# Altium PCB PCB1.PcbDoc
Units mm, origin at the board's own origin, x right, y up, seen from the top; angles counter-clockwise.
Board outline 66.42 x 48.26 mm, 2 copper layers (Top Layer, Bottom Layer); 20 components, 11 nets, 48 pads, 0 vias.
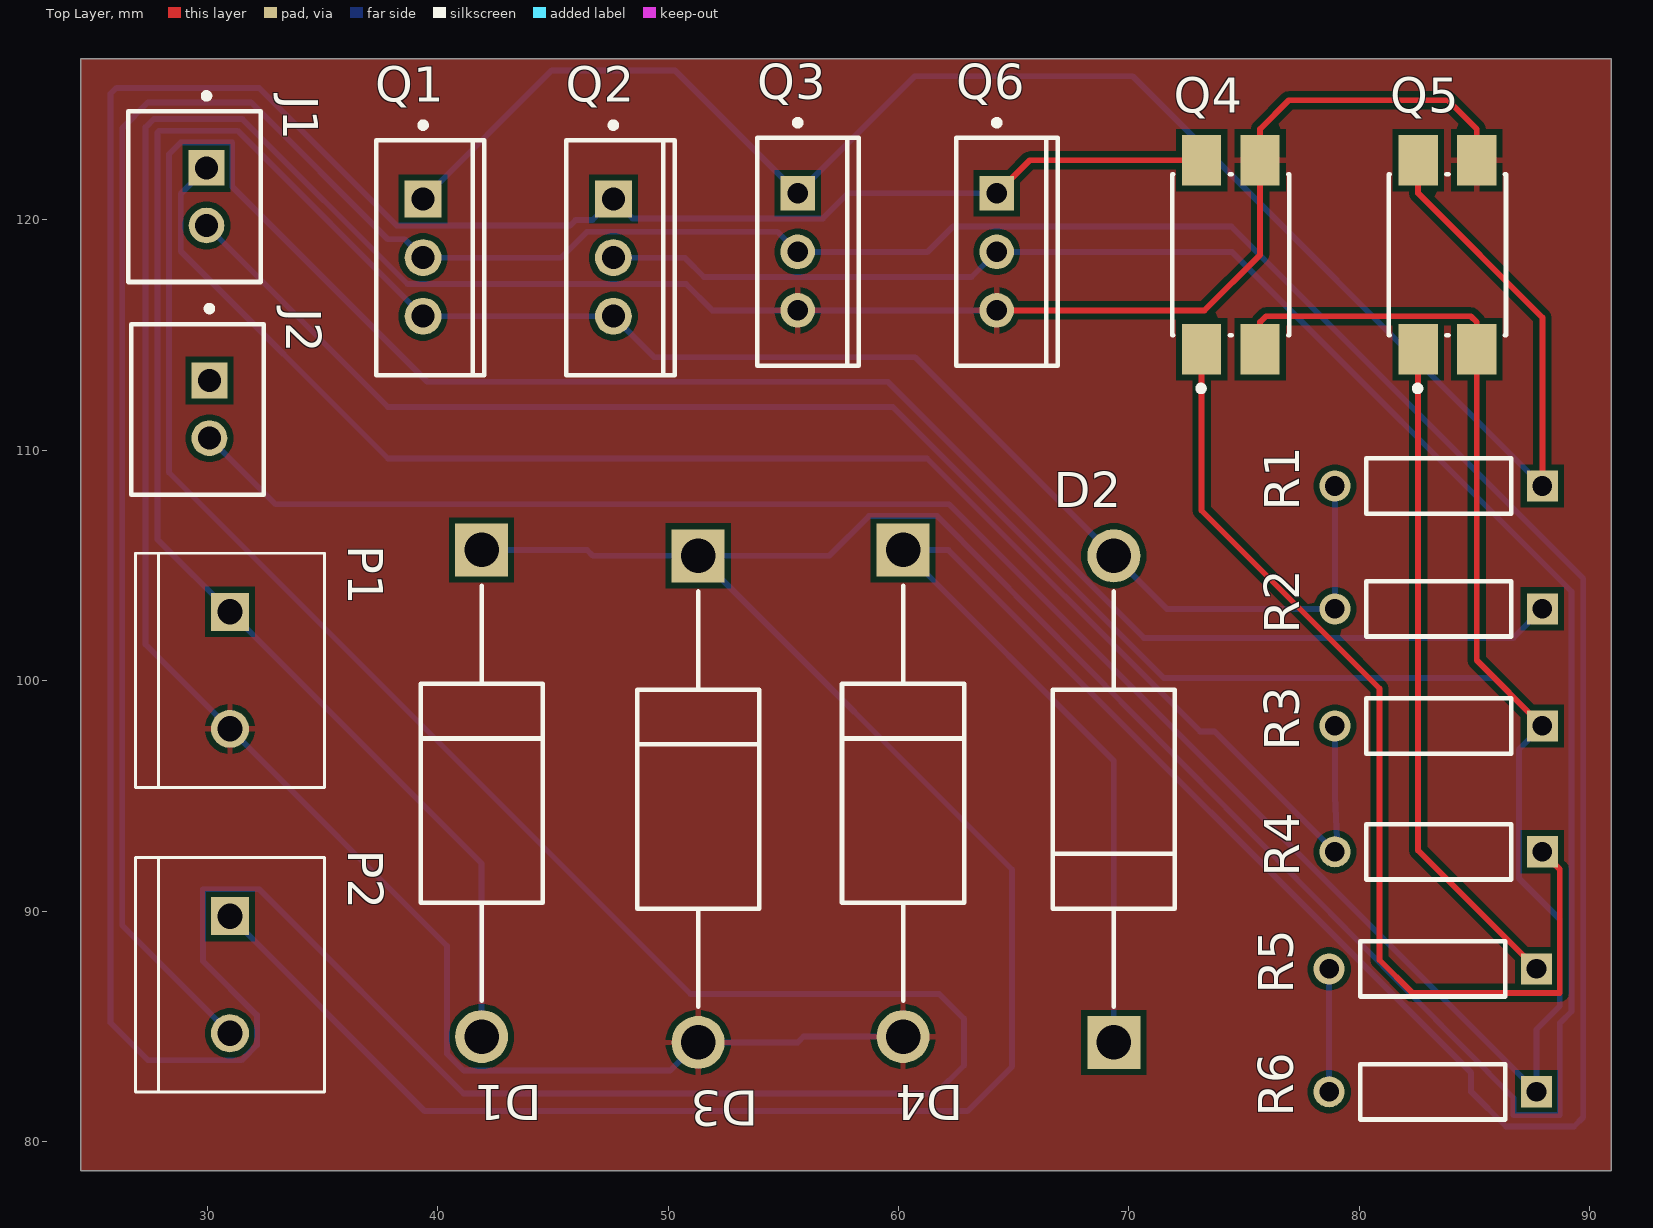
[diagram p0: Top Layer view]
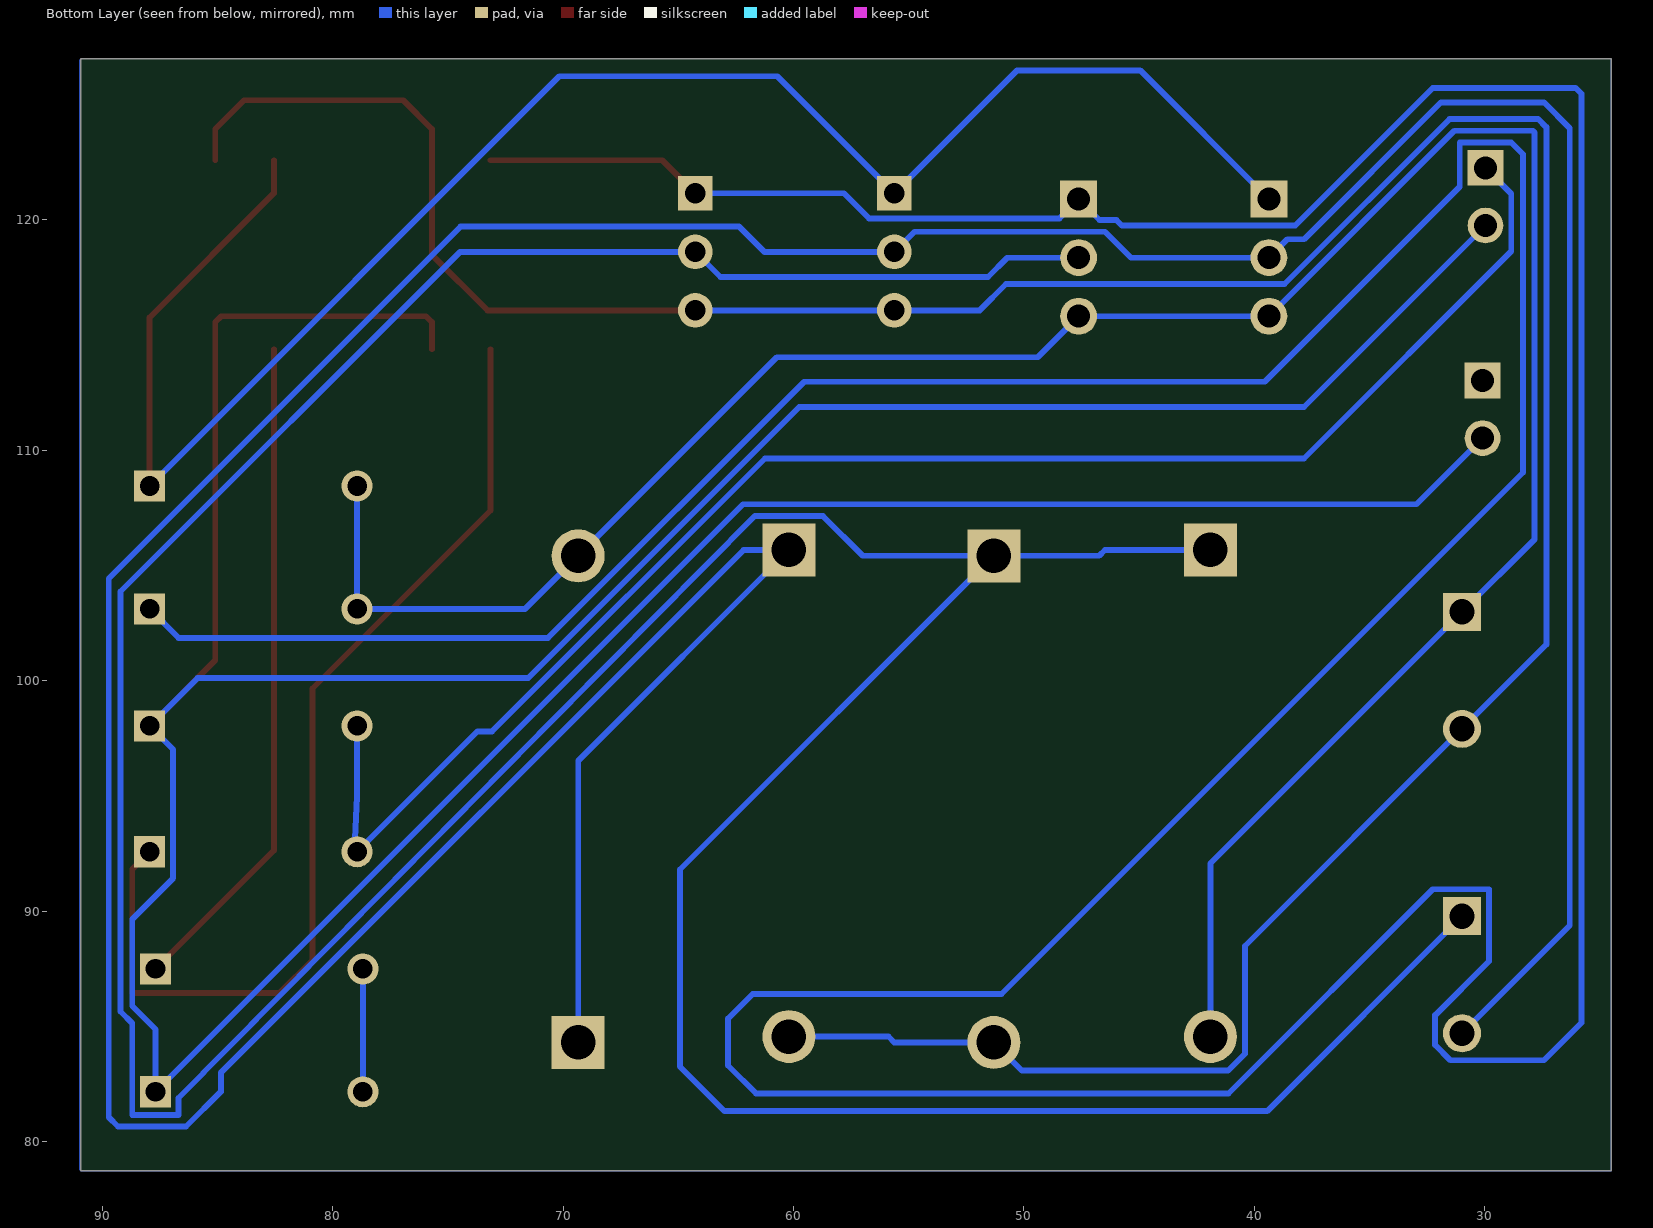
[diagram p1: Bottom Layer view, seen from below]
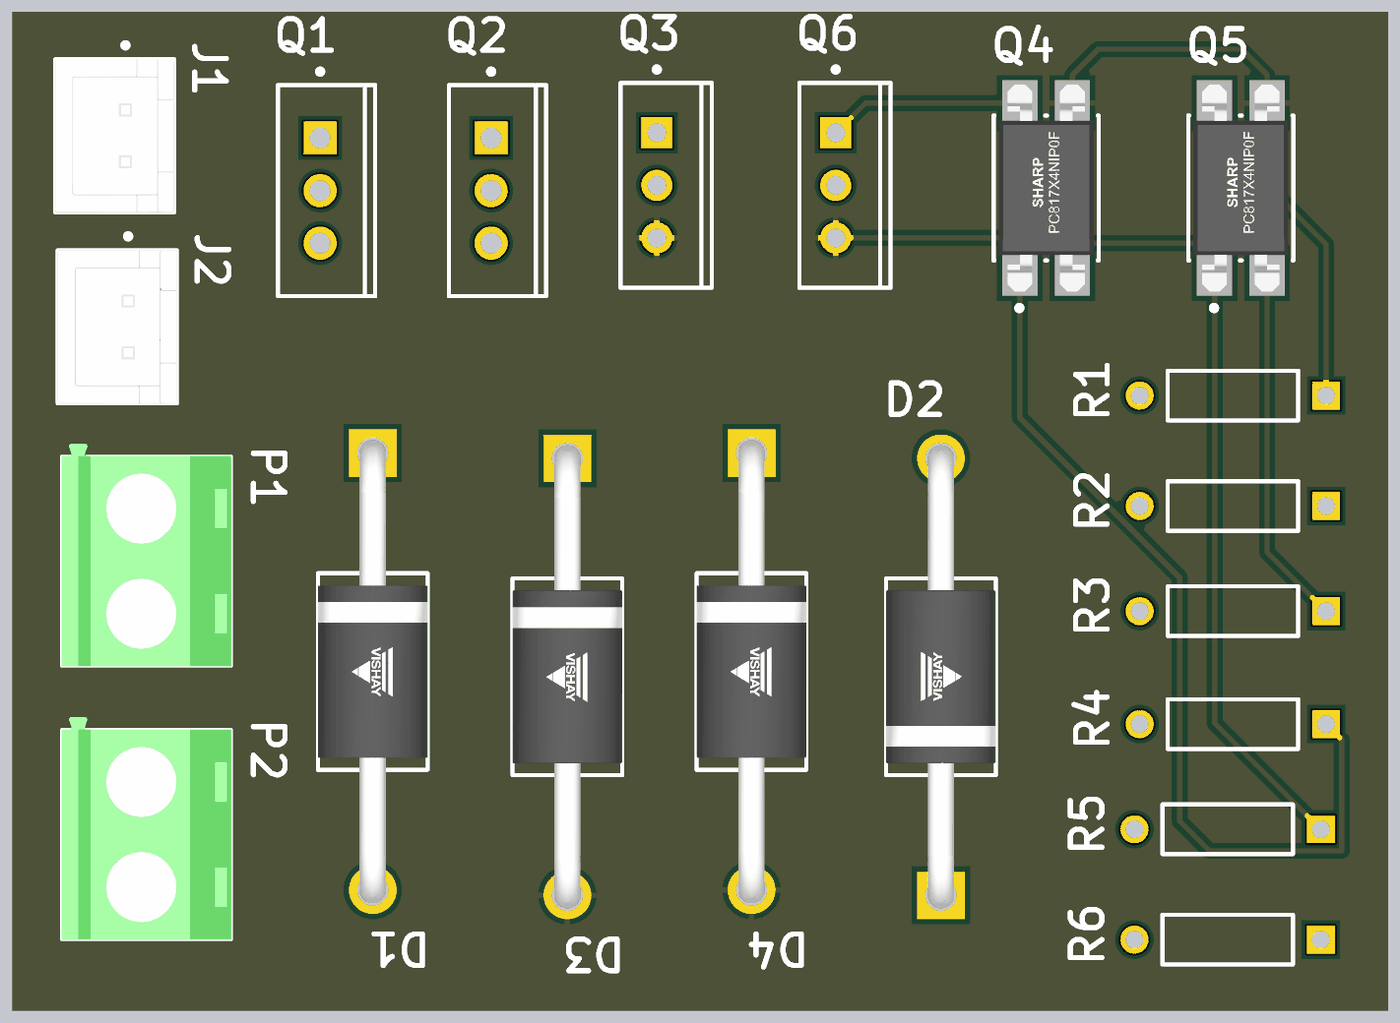
[diagram p2: 3D render of the assembled board from above, using the file's embedded part models]

## Layer stack, top to bottom
Top Solder: solder mask 0.0102, Solder Resist, Dk 3.5
Top Layer: signal copper 0.0356
Dielectric 1: dielectric 0.32, FR-4, Dk 4.8
Bottom Layer: signal copper 0.0356
Bottom Solder: solder mask 0.0102, Solder Resist, Dk 3.5

## Board outline
24.511,78.74 90.932,78.74 90.932,127 24.511,127

## Design rules (kind name [scope] priority, off if disabled: settings)
Clearance [All] p1: gap=0.254 ignorepadtopadclearanceinfootprint=FALSE except(0.127: SMDPad-SMDPad SMDPad-THPad THPad-THPad; 0.2: Arc-SMDPad Arc-THPad Track-SMDPad Track-THPad)
HoleSize [All] p1: absolutevalues=TRUE maxlimit=6.3 minlimit=0.3 maxpercent=80.000 minpercent=20.000
MinimumAnnularRing [All] p1: minimumring=0.13
PolygonConnect [All] p1: connectstyle=Relief reliefconductorwidth=0.254 reliefentries=4 polygonreliefangle="90 Angle" airgapwidth=0.254
RoutingVias [All] p1: holewidth=0.711 width=1.27 viastyle="Through Hole" minholewidth=0.711 minwidth=1.27 maxholewidth=0.711 maxwidth=1.27
SolderMaskExpansion [All] p1: expansion=0.102 istentingtop=FALSE
SupplyNets "Schematic Supply Nets_1" [InNet('+12')] p1: voltage=0.000
SupplyNets "Schematic Supply Nets" [InNet('GND')] p2: voltage=0.000
Width [All] p1: maxlimit=0.5 minlimit=0.254 preferedwidth=0.254 minimp=50.000000 maximp=50.000000 favimp=50.000000
29 further rules are at their usual default settings.

## Components (designator, comment, footprint, x,y, rotation, side; value= is the part's Value field where it differs from the comment)
D1 "1N5822-E3/54" FP-1N5822-E3-54-MFG 41.91,95.123 r270 top
D2 "1N5822-E3/54" FP-1N5822-E3-54-MFG 69.342,94.869 r90 top
D3 "1N5822-E3/54" FP-1N5822-E3-54-MFG 51.308,94.869 r270 top
D4 "1N5822-E3/54" FP-1N5822-E3-54-MFG 60.198,95.123 r270 top
J1 "B2B-XH-A(LF)(SN)" FP-B2B-XH-A_LF_SN-MFG 29.447,121.011 r270 top
J2 "B2B-XH-A(LF)(SN)" FP-B2B-XH-A_LF_SN-MFG 29.574,111.78 r270 top
P1 "282837-2" TE_282837-2 30.988,100.457 r270 top
P2 "282837-2" TE_282837-2 30.988,87.249 r270 top
Q1 "FQP27P06" FAIR-TO-220-3 39.37,118.364 r0 top
Q2 "FQP27P06" FAIR-TO-220-3 47.625,118.364 r0 top
Q3 "IRLB3034PBF" INF-PG-TO-220AB 55.626,118.618 r0 top
Q4 "PC817X4NIP0F" FP-PC817X4NIP0F-MFG 74.422,118.491 r90 top
Q5 "PC817X4NIP0F" FP-PC817X4NIP0F-MFG 83.82,118.491 r90 top
Q6 "IRLB3034PBF" INF-PG-TO-220AB 64.262,118.618 r0 top
R1 "MFR-25FBF5210K" RESA60-630X240 83.439,108.458 r180 top
R2 "MFR-25FBF5210K" RESA60-630X240 83.439,103.124 r180 top
R3 "MFR-25FBF5210K" RESA60-630X240 83.439,98.044 r180 top
R4 "MFR-25FBF52470Ohm" RESA60-630X240 83.439,92.583 r180 top
R5 "MFR-25FBF52470Ohm" RESA60-630X240 83.185,87.503 r180 top
R6 "MFR-25FBF5210K" RESA60-630X240 83.185,82.169 r180 top

## Footprints (in the part's own frame and the unit in brackets; to place one, negate y for a bottom-side part, rotate by r counter-clockwise, add the part's x,y. Pads: shape width x height; smd on the part's side, far side on the other; paste and mask are expansions set on the pad)
FAIR-TO-220-3 [mm] "FM, 3-Leads, Body 10.2x4.7mm, Pitch 2.54mm"
  rect 1.6x1.6 hole 1: 1(0,2.54)
  round 1.6 hole 1: 2(0,0) 3(0,-2.54)
  silkscreen extent -2.04,-5.1 2.66,5.87, body extent -2.04,-5.1 2.66,5.1, height 18.95
FP-1N5822-E3-54-MFG [mm]
  rect 2.3x2.3 hole 1.5 paste-2539.97 mask+0: 1(-10.558,0)
  round 2.3 hole 1.5 paste-2539.97 mask+0: 2(10.558,0)
  silkscreen extent -9.01,-2.65 9.01,2.65, body extent -11.81,-2.75 11.81,2.75, height 0.25
FP-B2B-XH-A_LF_SN-MFG [mm]
  rect 1.55x1.55 hole 1 paste-2539.97 mask+0: 1(-1.25,0.525)
  round 1.55 hole 1 paste-2539.97 mask+0: 2(1.25,0.525)
  silkscreen extent -4.5,-2.87 3.7,2.88, body extent -3.8,-2.98 3.8,2.98, height 0.25
FP-PC817X4NIP0F-MFG [mm]
  rect 2.2x1.7 smd paste+0 mask+0: 1(-4.1,1.27) 2(-4.1,-1.27) 3(4.1,-1.27) 4(4.1,1.27)
  silkscreen extent -5.92,-2.54 3.5,2.54, body extent -5.3,-2.64 5.3,2.64, height 0.25
INF-PG-TO-220AB [mm] "FM, 3-Leads, Body 9.9x4.4mm, Pitch 2.54mm"
  rect 1.5x1.5 hole 0.9: 1(0,2.54)
  round 1.5 hole 0.9: 2(0,0) 3(0,-2.54)
  silkscreen extent -1.75,-4.95 2.65,5.72, body extent -1.75,-4.95 2.65,4.95, height 20.2
RESA60-630X240 [mm] "Axial Resistor, 2-Leads, Dia 2.4mm, Body Length 6.3mm"
  rect 1.35x1.35 hole 0.85: 1(-4.5,0)
  round 1.35 hole 0.85: 2(4.5,0)
  silkscreen extent -3.15,-1.2 3.15,1.2, body extent -3.15,-1.2 3.15,1.2, height 2.4
TE_282837-2 [mm]
  rect 1.65x1.65 / inner round 1.65 / far side rect 1.65x1.65 hole 1.1: 1(-2.54,0)
  round 1.65 hole 1.1: 2(2.54,0)
  silkscreen extent -5.08,-4.1 5.08,4.1, body extent -5.68,-4.1 5.08,4.1, height 10

## Part data
D1 D2 D3 D4: library part CMP-02539-000009-1, "DIODE SCHOTTKY 40V 3A DO201AD", Forward Current=3A, Manufacturer=Vishay, Max Junction Temp=+125°C, Max Repetitive Reverse Voltage=40V, Max Surge Forward Current=80A, Package=0, Peak Reverse Current=2mA, Temperature="-65°C to +125°C", Temperature Range Low=-65°C, Automotive=No, Category=Diode, ComponentLink2Description=Datasheet, ComponentLink2URL=http://www.vishay.com/docs/88526/1n5820.pdf, Device Class L1="Discrete Semiconductors", Device Class L2=Diodes, Device Class L3="Schottky Diodes", Digikey Description="DIODE SCHOTTKY 40V 3A DO201AD", Height=5.3mm, Ipc Land Pattern Name=DIOPA2112W150L950D530, Lead Free=Yes, Manufacturer Part Number=1N5822-E3/54, Mouser Description="Schottky Diodes & Rectifiers Vr/40V Io/3A", Octopart=https://octopart.com/1n5822-e3%2F54-vishay-39548309, Reverse Voltage=40V, RoHS=TRUE, Temperature Range High=+125°C
J1 J2: library part CMP-2000-05888-3, "CONN HEADER VERT 2POS 2.5MM", Color=Natural, Contact Resistance=20mR, Current Rating=3A, Housing Color=White, Insulation Resistance=1GR, Max Operating Temperature=85°C, Max Voltage Rating (AC)=250V, Min Operating Temperature=-25°C, Connector Type="Male Pin", Contact Material=Brass, Contact Plating=Tin, Contact Type="Male Pin", Depth=5.75mm, Fastening Type=Detent, Housing Material=Polyamide, Lead Free="Lead Free", Lead Pitch=2.5mm, Length=7.4mm, Max Current Rating=3A, Max Voltage Rating (DC)=250V, Mount="Through Hole", Number of Contacts=2, Number of Positions=2, Number of Rows=1, Orientation=Straight, Packaging=Bulk, Pitch=2.5mm, REACH SVHC="No SVHC", Series=XH, Termination=Solder, Voltage Rating=250V, Voltage Rating (AC)=250V, Wire/Cable Gauge=22AWG
P1 P2: "Ð Ð°Ð·ÑŠÐµÐ¼Ð½Ñ‹Ðµ ÐºÐ»ÐµÐ¼Ð¼Ð½Ñ‹Ðµ ÐºÐ¾Ð»Ð¾Ð´ÐºÐ¸ Ð Ð¾Ð·ÐµÑ‚ÐºÐ° 2 Ð¿Ð¾Ð»Ð¾Ð¶ÐµÐ½Ð¸Ñ 5,08 Ð¼Ð¼ ÐŸÑ€Ð¸Ð¿Ð¾Ð¹ Ð¿Ñ€ÑÐ¼Ð¾Ð¹ Ñ‡ÐµÑ€ÐµÐ· Ð¾Ñ‚Ð²ÐµÑ€ÑÑ‚Ð¸Ðµ 13,5 Ð / ÐºÐ¾Ð½Ñ‚Ð°ÐºÑ‚", Package=None, Availability="In Stock", Check_prices=https://www.snapeda.com/parts/282837-2/TE+Connectivity+AMP+Connectors/view-part/?ref=eda, MF="TE Connectivity", MP=282837-2, Price=None, Purchase-URL=https://pricing.snapeda.com/search/part/282837-2/?ref=eda, SnapEDA_Link=https://www.snapeda.com/parts/282837-2/TE+Connectivity+AMP+Connectors/view-part/?ref=snap
Q1 Q2: library part CMP-2000-04936-1, "P-Channel QFET(R) MOSFET, -60 V, -27 A, -55 to 175 degC, 3-Pin TO-220, RoHS, Tube", Drain-Source On Resistance-Max=0.07O, Drain-to-Source Voltage [Vdss]=60V, Manufacturer=Fairchild, Package Description="3-Pin Through Hole Device, Body 10 x 4.5 mm, Pitch 2.54 mm", Package Reference=TO-220, Rated Power Dissipation=120W, Channel Type=P-Channel, Datasheet URL=https://www.fairchildsemi.com/datasheets/FQ/FQP27P06.pdf, Datasheet Version=Mar-13, Manufacturer URL=https://www.fairchildsemi.com/, Package URL=https://www.fairchildsemi.com/package-drawings/TO/TO220B03.pdf, Qg Gate Charge=33nC
Q3 Q6: library part CMP-2000-04998-1, "Mosfet N-Channel, 40 V, 195 A, -55 to 175 degC, 3-Pin TO-220AB, RoHS, Tube", Forward Diode Voltage=1.3V, Manufacturer="International Rectifier", Maximum Continuous Drain Current=343A, Maximum Drain Source Resistance=2mΩ, Maximum Drain Source Voltage=40V, Maximum Gate Source Voltage=±20V, Maximum Operating Temperature=+175degC, Maximum Power Dissipation=375W, Minimum Operating Temperature=-55degC, Operating Temperature Range=-55to+175degC, Package Description="3-Pin Plastic (Green) Transistor Single Outline Package, 9.9 x 9.2 mm Body, 2.54 mm Pitch", Package Reference=PG-TO-220AB, Package Type=TO-220AB, Package Version=Feb-04, Typical Input Capacitance @ Vds=10315pF@25V, Category=PowerMOSFET, Channel Mode=Enhancement, Channel Type=N, Configuration=Single, Datasheet URL=https://datasheet.ciiva.com/26325/161162-da-01-en-mosfet-irlb3034pbf-to220ab-ir-26325354.pdf, Datasheet Version=Jan-09, Dimensions=10.54x4.69x15.24mm, Forward Transconductance=286S, Height=15.24mm, Length=10.54mm, Manufacturer URL=http://internationalrectifier.com/, Mounting Type=ThroughHole, Number of Elements per Chip=1, Package URL=http://www.infineon.com/dgdl/bts110.pdf?folderId=db3a304412b407950112b43583c16310&fileId=db3a304412b407950112b43584326311&sId=db3a30443e3c704d013e4eb6657a2604, Pin Count=3, Series=HEXFETSeries, Typical Gate Charge @ Vgs=54nC@4.5V, Typical Turn On Delay Time=65ns, Typical TurnOff Delay Time=97ns, Width=4.69mm
Q4 Q5: library part CMP-65434-000001-1, "OPTOISOLATOR 5KV TRANS 4SMD", Collector Emitter Voltage=80V, Emiiter Collector Voltage=6V, Forward Current=20mA, Forward Voltage=1.2V, Isolation Voltage=5kVrms, Manufacturer=Sharp, Max Current Transfer Ratio=600%, Min Current Transfer Ratio=50%, Power Dissipation=200mW, Temperature="-30°C to +100°C", Temperature Range High=+100°C, Temperature Range Low=-30°C, Automotive=No, Category=Trans, ComponentLink2Description=Datasheet, ComponentLink2URL=https://www.sharpsde.com/fileadmin/products/Optoelectronics/Isolation%20Devices/Specs%20Photocoupler/PC817XxNIP0F_17Jun08_Spec_ED-04P129A.pdf, Device Class L1=Optoelectronics, Device Class L2=Optocouplers, Device Class L3=unset, Digikey Description="OPTOISOLATOR 5KV TRANS 4SMD", Height=4.6mm, Lead Free=Yes, Manufacturer Part Number=PC817X4NIP0F, Mouser Description="Transistor Output Optocouplers Photocoupler 300-600% CRT", Octopart=https://octopart.com/pc817x4nip0f-sharp-20650453, Package=PC817X4NIP0F, Reverse Voltage=6V, RoHS=TRUE, Standoff Height=0.1mm
R1 R2 R3 R6: library part CMP-1659-00074-2, "Axial Resistor, 10 KOhm, +/- 1%, 0.25 W, -55 to 155 degC, 2-Pin THD, RoHS, Bulk", Case\/Package=Axial, Manufacturer=Yageo, Max Operating Temperature=155degC, Max Power Dissipation=250mW, Min Operating Temperature=-55degC, Package Description="2-Pin Axial Lead, Dia 2.4 mm, Body Length 6.3 mm", Package Quantity=200, Package Reference=MFR-25, Resistance=10KOhm, Temperature Coefficient=100ppm\/degreesC, Tolerance=1%, Voltage Rating=250V, Voltage Rating (DC)=200V, Composition=MetalFilm, Datasheet URL=http://www.yageo.com/documents/recent/Yageo%20LR_MFR_2013.pdf, Datasheet Version=04/2013, Lead Free=LeadFree, Length=0.248inch, Manufacturer URL=http://www.yageo.com/, Military Standard=Not, Mount=ThroughHole, Mounting Technology=ThroughHole, Number of Terminations=2, Packaging=Bulk, Power Rating=250mW, RoHSCompliant=True, Termination=Axial
R4 R5: library part CMP-1659-00074-2, "Axial Resistor, 470 Ohm, +/- 1%, 0.25 W, -55 to 155 degC, 2-Pin THD, RoHS, Bulk", Case\/Package=Axial, Manufacturer=Yageo, Max Operating Temperature=155degC, Max Power Dissipation=250mW, Min Operating Temperature=-55degC, Package Description="2-Pin Axial Lead, Dia 2.4 mm, Body Length 6.3 mm", Package Quantity=200, Package Reference=MFR-25, Resistance=10KOhm, Temperature Coefficient=100ppm\/degreesC, Tolerance=1%, Voltage Rating=250V, Voltage Rating (DC)=200V, Composition=MetalFilm, Datasheet URL=http://www.yageo.com/documents/recent/Yageo%20LR_MFR_2013.pdf, Datasheet Version=04/2013, Lead Free=LeadFree, Length=0.248inch, Manufacturer URL=http://www.yageo.com/, Military Standard=Not, Mount=ThroughHole, Mounting Technology=ThroughHole, Number of Terminations=2, Packaging=Bulk, Power Rating=250mW, RoHSCompliant=True, Termination=Axial

## Nets (pads, with @x,y where several pads share a name; then routed paths per layer and width w, separated by ;. In a path a pad name is that pad's centre, name@x,y a point inside that pad or via, vN(x,y) a via of type N, cw(c..) or ccw(c..) an arc to the next point about the centre after c; other vN are vias at no path point)
+12: D1.2 D2.2 P1.1 Q1.3 Q2.3 R1.2 R2.2 | length 110.1
  Bottom Layer w0.254: D1.2 41.91,92.075 P1.1 27.838,106.147 27.838,123.793 27.916,123.871 31.323,123.871 Q1.3 Q2.3 49.403,114.046 60.723,114.046 D2.2 71.645,103.124 R2.2 R1.2
GND: D3.2 D4.2 P1.2 Q3.3 Q4.3 Q5.3 Q6.3 | length 136.5
  Top Layer w0.254: Q6.3 73.279,116.078 75.692,118.491 Q4.3 75.692,123.952 76.937,125.197 83.845,125.197 85.09,123.952 Q5.3
  Bottom Layer w0.254: D4.2 55.88,84.565 55.626,84.311 D3.2 50.085,83.088 41.143,83.088 40.411,83.82 40.411,88.494 P1.2 27.33,101.575 27.33,124.028 27.686,124.384 31.529,124.384 38.691,117.221 50.775,117.221 51.918,116.078 Q3.3 Q6.3
gndmcu: J1.2 J2.2 Q4.2 Q5.2 R3.1 R6.1 | length 183.2
  Top Layer w0.254: Q4.2 75.692,115.57 75.946,115.824 84.836,115.824 85.09,115.57 Q5.2 85.09,100.893 R3.1
  Bottom Layer w0.254: J1.2 37.846,111.887 59.753,111.887 71.513,100.127 85.856,100.127 R3.1 86.919,97.024 86.919,91.44 88.697,89.662 88.697,85.889 87.685,84.877 R6.1 62.188,107.666 32.963,107.666 J2.2
m1: D2.1 D4.1 P2.2 Q1.2 Q3.2 | length 204.5
  Bottom Layer w0.254: P2.2 26.314,89.383 26.314,123.986 27.432,125.103 31.901,125.103 37.84,119.164 38.57,119.164 Q1.2 45.355,118.364 46.482,119.491 54.753,119.491 Q3.2 61.265,118.618 62.357,119.71 74.446,119.71 89.713,104.443 89.713,81.064 89.308,80.659 86.36,80.659 84.848,82.171 84.848,82.995 62.162,105.681 D4.1 69.342,96.537 D2.1
m2: D1.1 D3.1 P2.1 Q2.2 Q6.2 | length 196.3
  Bottom Layer w0.254: P2.1 39.446,81.331 62.992,81.331 64.922,83.261 64.922,91.813 D3.1 ; D1.1 46.482,105.681 46.736,105.427 D3.1 ; Q2.2 50.724,118.364 51.562,117.526 63.17,117.526 Q6.2 74.463,118.618 89.205,103.876 89.205,85.649 88.697,85.141 88.697,81.167 86.683,81.167 86.683,81.897 61.675,107.158 58.725,107.158 56.994,105.427 D3.1
mcu1_signal: J1.1 R3.2 R4.2 | length 70.5
  Bottom Layer w0.254: J1.1 28.854,121.143 28.854,118.643 37.846,109.652 61.239,109.652 73.088,97.803 73.719,97.803 R4.2 79.049,92.693 78.939,94.979 R3.2
mcu2_signal: R5.2 R6.2 | length 5.3
  Bottom Layer w0.254: R6.2 R5.2
NetQ1_1: Q1.1 Q3.1 Q5.4 R1.1 | length 78.9
  Top Layer w0.254: Q5.4 82.55,121.158 87.939,115.769 R1.1
  Bottom Layer w0.254: Q1.1 44.958,126.492 50.292,126.492 Q3.1 60.706,126.238 70.159,126.238 R1.1
NetQ2_1: Q2.1 Q4.4 Q6.1 R2.1 | length 274.8
  Top Layer w0.254: Q6.1 65.695,122.591 Q4.4
  Bottom Layer w0.254: Q6.1 57.81,121.158 56.718,120.066 48.463,120.066 Q2.1 46.72,119.999 45.99,119.999 45.752,119.761 38.227,119.761 32.258,125.73 26.06,125.73 25.806,125.476 25.806,85.166 27.432,83.541 31.496,83.541 32.156,84.201 32.156,85.496 29.82,87.833 29.82,90.957 32.258,90.957 41.123,82.093 61.62,82.093 62.84,83.312 62.84,85.344 61.771,86.413 50.976,86.413 28.346,109.042 28.346,122.855 28.854,123.363 31.09,123.363 31.09,121.437 39.548,112.979 59.538,112.979 70.649,101.867 86.682,101.867 R2.1
NetQ4_1: Q4.1 R4.1 | length 44.6
  Top Layer w0.254: Q4.1 73.152,107.391 80.874,99.67 80.874,87.884 82.296,86.462 88.697,86.462 88.697,91.825 R4.1
NetQ5_1: Q5.1 R5.1 | length 29
  Top Layer w0.254: Q5.1 82.55,92.638 R5.1
pads on no net: J2.1

## Polygon pours and split planes (outlines as drawn)
no net on Bottom Layer "NONET_L02_P001" (solid, pour order 1): 90.995,126.936 90.995,78.803 90.932,78.74 24.511,78.74 24.511,127 90.879,127
GND on Top Layer "GND_L01_P000" (solid, pour order 0): 24.511,127 91.059,127 90.932,126.873 90.932,78.74 24.511,78.74